# Altium PCB 388D_Control_v1_PCB1.PcbDoc (part 7 of 7)
Units mil, origin at the board's own origin, x right, y up, seen from the top; angles counter-clockwise.
Board outline 3431 x 3800 mil, 6 copper layers (Top Layer, Singal Layer 2, Signal layer 3, Signal Layer 4, Signal Layer 5, Bottom Layer), stack 32.7 mil thick; 270 components, 383 nets, 1462 pads, 899 vias.
Unrouted connection lines stored in the file: 19.
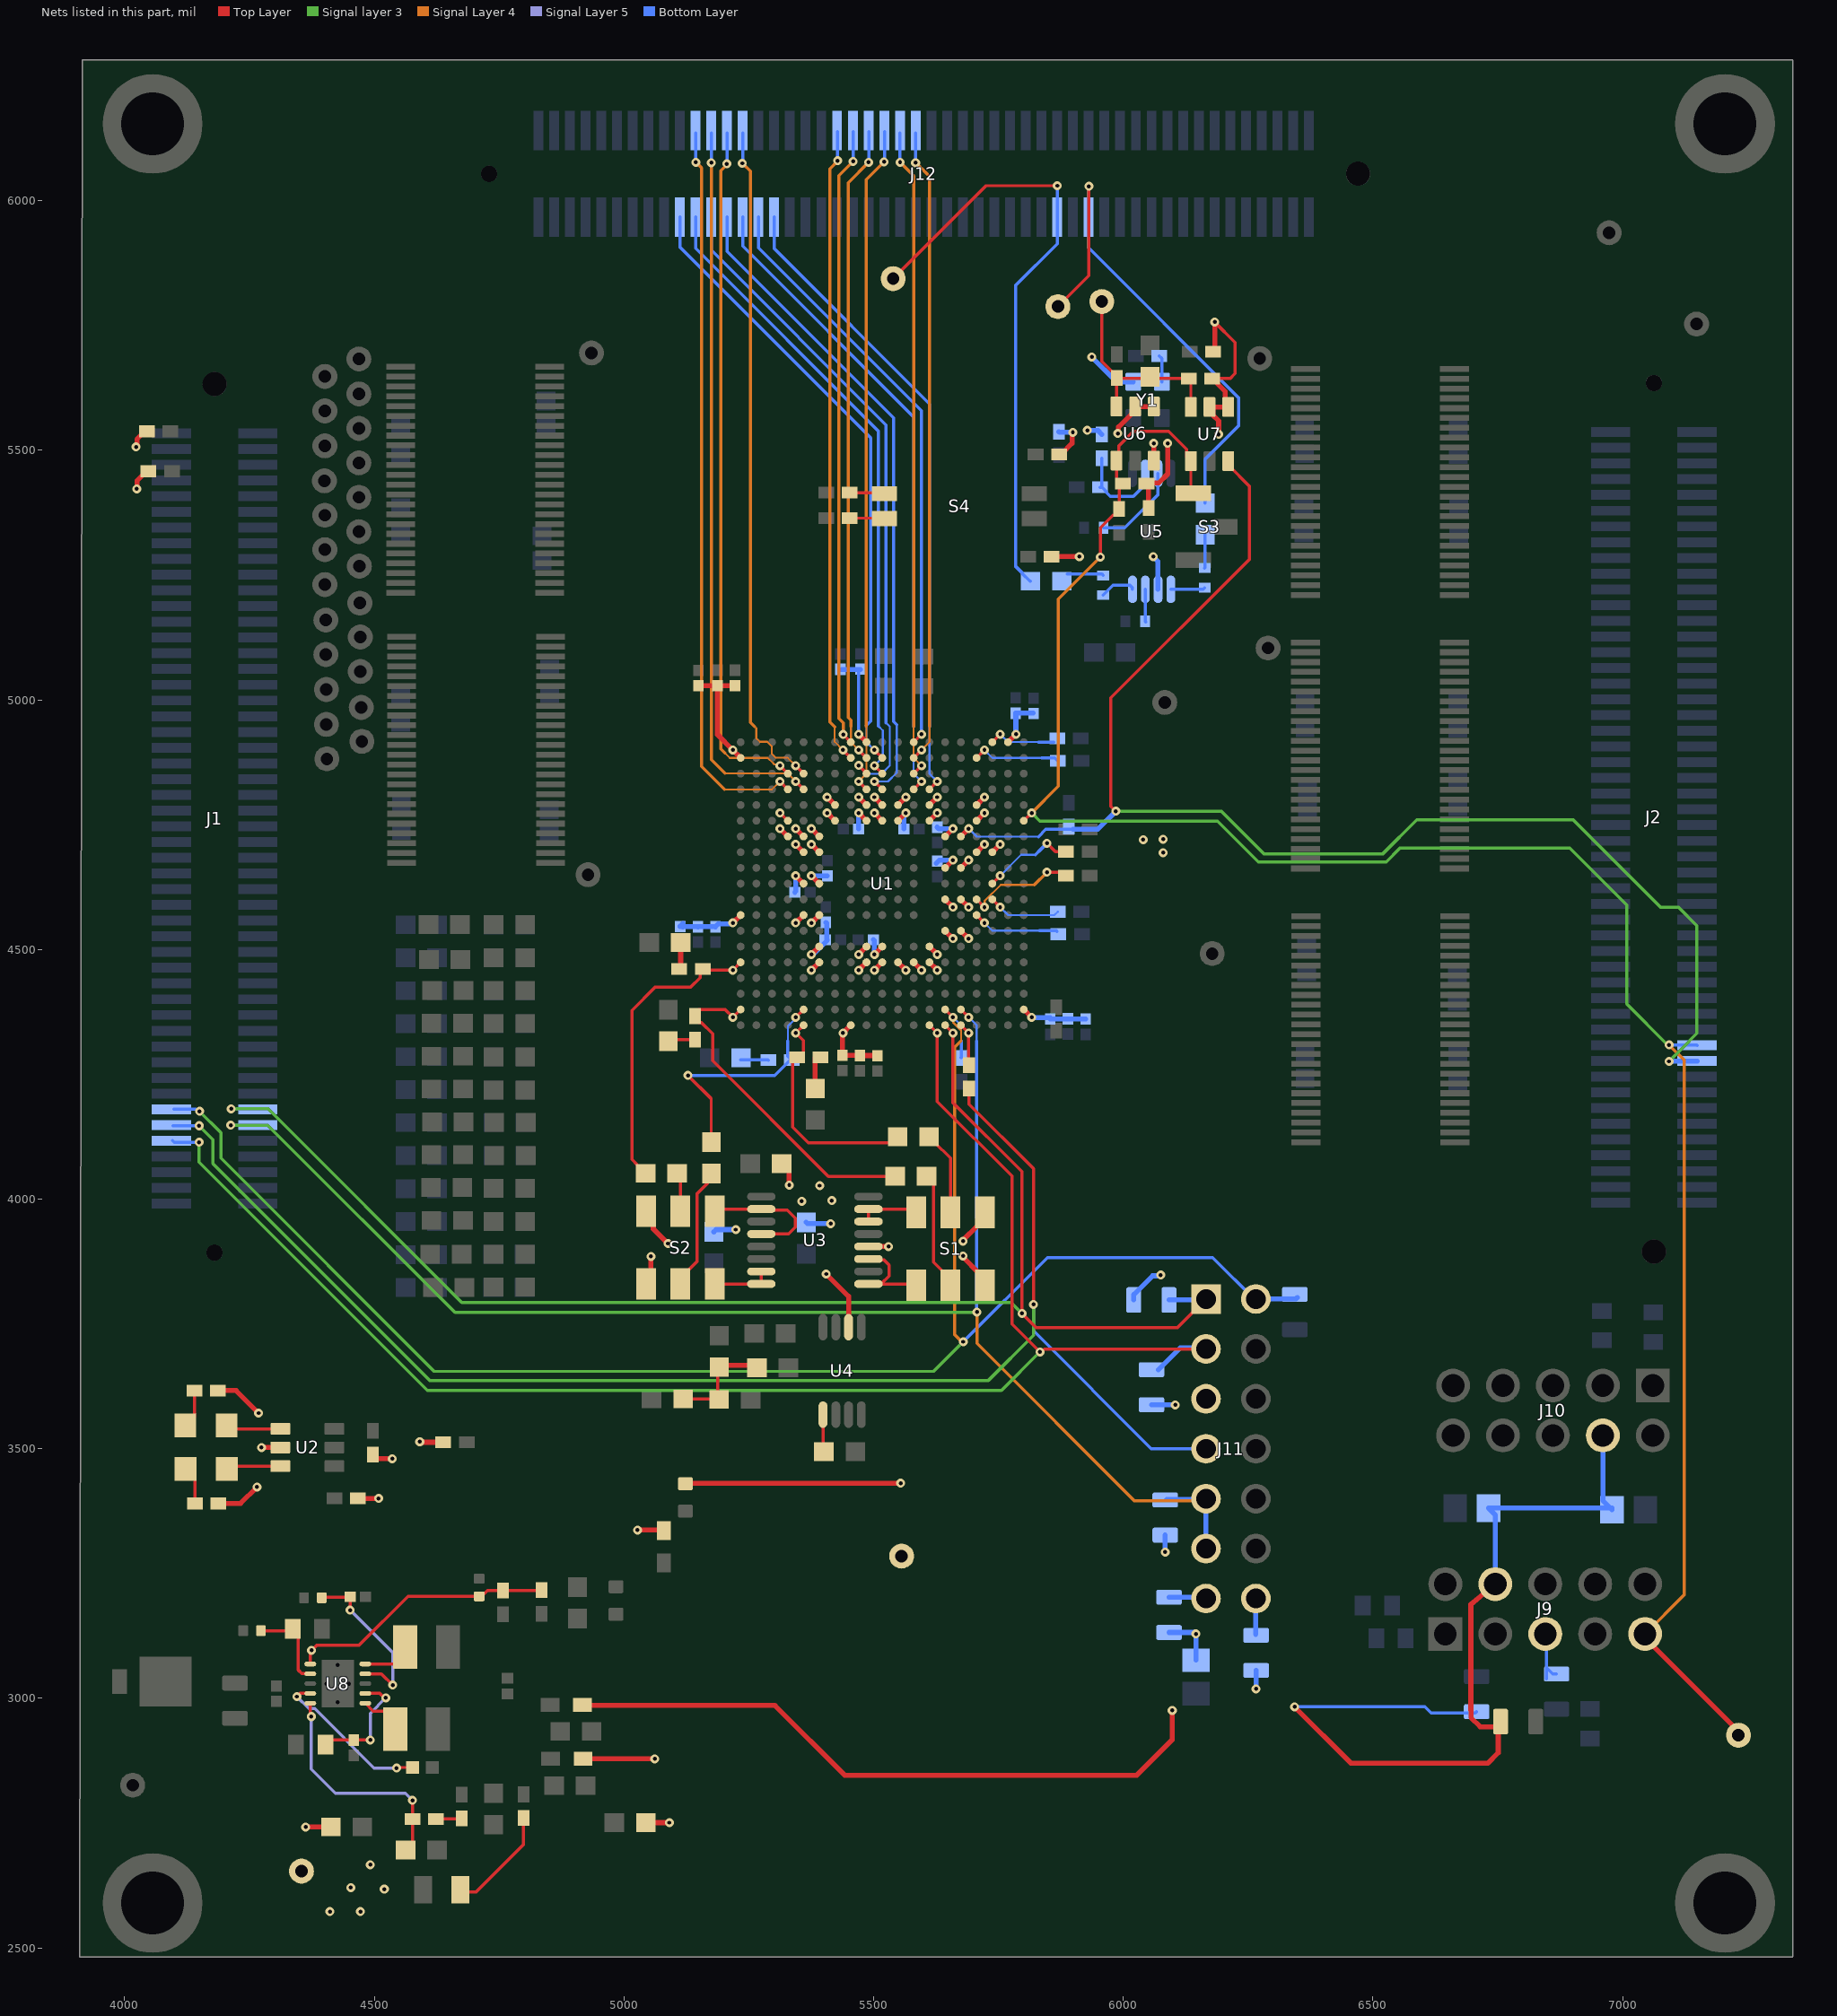
[diagram p9: the nets of this part, all layers, seen from the top]

## Via types
v1: diameter 18, hole 8, Top Layer to Bottom Layer, tented both sides, 898 vias
v2: diameter 18/18/18/18/18/18 (per signal layer), hole 8, Top Layer to Bottom Layer, tented both sides, 1 vias

## Nets (pads, with @x,y where several pads share a name; then routed paths per layer and width w, separated by ;. In a path a pad name is that pad's centre, name@x,y a point inside that pad or via, vN(x,y) a via of type N, cw(c..) or ccw(c..) an arc to the next point about the centre after c; other vN are vias at no path point) (continued)
MCU_GPIO152: J12.69 U1.D13 | length 1288.2
  Top Layer w6.25: U1.D13@5611.66,4820.97 v1(5627.41,4836.71)
  Bottom Layer w4: 5612.01,4947.1 5612.01,4852.12 v1(5627.41,4836.71)
  Bottom Layer w6.25: J12.69@5300.79,5967.39 5300.79,5904.21 5612.01,5592.99 5612.01,4947.1
MCU_GPIO153: J12.71 U1.A12 | length 1193.7
  Top Layer w6.25: U1.A12@5580.17,4915.45 v1(5595.92,4931.2)
  Bottom Layer w6.25: J12.71@5269.29,5967.39 5269.29,5905.71 5595.92,5579.08 v1(5595.92,4931.2)
MCU_GPIO154: J12.52 U1.B12 | length 1271.2
  Top Layer w6.25: U1.B12@5580.17,4883.96 v1(5595.92,4899.7)
  Signal Layer 4 w4: v1(5595.92,4899.7) 5612.01,4915.8 5612.01,4946.95
  Signal Layer 4 w6.25: v1@5588.49,6072.51 5612.01,6048.99 5612.01,4946.95
  Bottom Layer w6.25: J12.52@5583.84,6135.61 5583.84,6076.16 v1(5584,6076)
MCU_GPIO155: J12.54 U1.C12 | length 1307.7
  Top Layer w6.25: U1.C12@5580.17,4852.46 v1(5595.92,4868.21)
  Signal Layer 4 w4: 5580.17,4946.95 5580.17,4883.96 v1(5595.92,4868.21)
  Signal Layer 4 w6.25: v1(5553,6077) 5580.17,6049.83 5580.17,4946.95
  Bottom Layer w6.25: J12.54@5552.35,6135.61 5552.35,6077.65 v1(5553,6077)
MCU_GPIO156: J12.73 U1.D12 | length 1301.3
  Top Layer w6.25: U1.D12@5580.17,4820.97 v1(5595.92,4836.71)
  Bottom Layer w4: 5580.01,4946.95 5580.01,4852.62 v1(5595.92,4836.71)
  Bottom Layer w6.25: J12.73@5237.8,5967.39 5237.8,5909.2 5580.01,5566.99 5580.01,4946.95
MCU_GPIO157: J12.81 U1.B10 | length 1258.5
  Top Layer w6.25: v1(5501.43,4899.7) U1.B10@5517.18,4883.96
  Bottom Layer w4: 5485.4,4948.74 5485.4,4915.73 v1(5501.43,4899.7)
  Bottom Layer w6.25: J12.81@5111.81,5967.39 5111.81,5907.19 5494.01,5524.99 5494.01,4957.34 5485.4,4948.74
MCU_GPIO158: J12.79 U1.C10 | length 1283.9
  Top Layer w6.25: v1(5501.43,4868.21) U1.C10@5517.18,4852.46
  Bottom Layer w4: v1(5501.43,4868.21) 5518.4,4885.19 5518.4,4938.7 5509.01,4948.1
  Bottom Layer w6.25: J12.79@5143.31,5967.39 5143.31,5904.69 5509.01,5538.99 5509.01,4948.1
MCU_GPIO159: J12.75 U1.D10 | length 1328.4
  Top Layer w6.25: v1(5501.43,4836.71) U1.D10@5517.18,4820.97
  Bottom Layer w4: v1(5501.43,4836.71) 5528.67,4836.71 5546.4,4854.45 5546.4,4950.14
  Bottom Layer w6.25: J12.75@5206.3,5967.39 5206.3,5898.7 5540.01,5564.99 5540.01,4956.54 5546.4,4950.14
MCU_GPIO160: J12.58 U1.B9 | length 1287
  Top Layer w6.25: v1(5469.93,4899.7) U1.B9@5485.68,4883.96
  Signal Layer 4 w4: 5454.4,4946.95 5454.4,4915.23 v1(5469.93,4899.7)
  Signal Layer 4 w6.25: 5454.4,4946.95 5454.4,4959.29 5449,4964.7 5449,6036 v1(5490,6077)
  Bottom Layer w6.25: v1(5490,6077) 5490.34,6077.34 J12.58@5490.34,6138.61
MCU_GPIO161: J12.77 U1.C9 | length 1346.4
  Top Layer w6.25: v1(5470,4869) 5485.68,4853.32 U1.C9@5485.68,4852.46
  Bottom Layer w4: v1(5470,4869) 5487,4852 5516,4852 5532.4,4868.4 5532.4,4946.55 5525,4953.96
  Bottom Layer w6.25: J12.77@5174.8,5967.39 5174.8,5901.2 5525,5551 5525,4953.96
MCU_GPIO162: J12.56 U1.D9 | length 1345.7
  Top Layer w6.25: v1(5469.93,4836.71) U1.D9@5485.68,4820.97
  Signal Layer 4 w4: v1(5469.93,4836.71) 5485.4,4852.19 5485.4,4946.95
  Signal Layer 4 w6.25: 5485.4,4946.95 5485.4,6042.4 v1(5521,6078)
  Bottom Layer w6.25: v1(5521,6078) 5521.83,6078.83 J12.56@5521.83,6138.61
MCU_GPIO163: J12.60 U1.A8 | length 1245.3
  Top Layer w6.25: v1(5439,4931) 5439,4930.64 U1.A8@5454.19,4915.45
  Signal Layer 4 w6.25: v1(5439,4931) 5439,4954 5430,4963 5430,6050 v1(5459,6079)
  Bottom Layer w6.25: J12.60@5458.84,6138.61 5458.84,6079.16 v1(5459,6079)
MCU_GPIO164: J12.62 U1.B8 | length 1279
  Top Layer w6.25: v1(5438.44,4899.7) U1.B8@5454.19,4883.96
  Signal Layer 4 w4: 5422.01,4946.1 5422.01,4916.13 v1(5438.44,4899.7)
  Signal Layer 4 w6.25: 5422.01,4946.1 5412.01,4956.1 5412.01,6064.01 v1(5428,6080)
  Bottom Layer w6.25: J12.62@5427.35,6138.61 5427.35,6080.65 v1(5428,6080)
MCU_GPIO165: J12.74 U1.C5 | length 1357.2
  Top Layer w6.25: v1(5343.95,4868.21) U1.C5@5359.7,4852.46
  Signal Layer 4 w4: 5261.16,4946.95 5265.01,4943.1 5265.01,4923.1 5272.01,4916.1 5287.01,4916.1 5296.01,4907.1 5296.01,4892.1 5304.01,4884.1 5328.06,4884.1 v1(5343.95,4868.21)
  Signal Layer 4 w6.25: v1(5237,6075) 5253.01,6058.99 5253.01,4955.1 5261.16,4946.95
  Bottom Layer w6.25: v1(5237,6075) 5237.83,6075.83 J12.74@5237.83,6135.61
MCU_GPIO166: J12.78 U1.D5 | length 1455.6
  Top Layer w6.25: v1(5343.95,4836.71) U1.D5@5359.7,4820.97
  Signal Layer 4 w4: 5202.22,4853.1 5327.56,4853.1 v1(5343.95,4836.71)
  Signal Layer 4 w6.25: 5175,6066.98 5175,4880.32 5202.22,4853.1
  Bottom Layer w6.25: J12.78@5174.84,6135.61 5174.84,6076.16 v1(5175,6076)
MCU_GPIO167: J12.76 U1.C4 | length 1388.6
  Top Layer w6.25: v1(5312.45,4868.21) U1.C4@5328.2,4852.46
  Signal Layer 4 w4: 5202,4894 5212.04,4883.96 5288.04,4883.96 5299.01,4872.99 5301.11,4870.89 5309.77,4870.89 v1(5312.45,4868.21)
  Signal Layer 4 w6.25: 5202,4894 5194,4902 5194,6060 v1@5204,6070
  Bottom Layer w6.25: v1(5206,6074) 5206.34,6074.34 J12.76@5206.34,6135.61
MCU_GPIO168: J12.80 U1.D4 | length 1479.1
  Top Layer w6.25: v1(5312.45,4836.71) U1.D4@5328.2,4820.97
  Signal Layer 4 w4: 5201.03,4820.74 5296.48,4820.74 v1(5312.45,4836.71)
  Signal Layer 4 w6.25: v1(5144,6077) 5155.01,6065.99 5155.01,4866.76 5201.03,4820.74
  Bottom Layer w6.25: J12.80@5143.35,6135.61 5143.35,6077.65 v1(5144,6077)
MCU_TCK: J1.89 J11.9 J11.11 R173.1 U1.V15 | length 3164.7
  Top Layer w6.25: U1.V15@5674.66,4380.02 v1(5690.4,4364.27)
  Signal layer 3 w6.25: v1(4212.43,4148.1) 4286.45,4148.1 4661.55,3773 5706,3773 v1(5707,3774)
  Signal Layer 4 w6.25: v1(5707,3774) 5707,3711 6022,3396 6161.5,3396 J11.9@6165.5,3400
  Bottom Layer w4: v1(5690.4,4364.27) 5706.01,4348.67 5706.01,4317.03
  Bottom Layer w6.25: v1(4212.43,4148.1) J1.89@4271.11,4148.1 ; 5706.01,4317.03 5706.01,3774.99 v1(5707,3774) ; R173.1@6084,3397.43 6086.57,3400 J11.9@6165.5,3400
  Bottom Layer w10: J11.11@6165.5,3300 J11.9@6165.5,3400
MCU_TDI: J1.92 J11.3 R172.1 U1.W13 | length 3204.5
  Top Layer w6.25: U1.W13@5611.66,4348.52 v1(5627.41,4332.78) 5627.41,4195.7 5777,4046.11 5777,3750 v1(5833,3694) 5836.18,3694 5841.68,3699.5 6165,3699.5 J11.3@6165.5,3700
  Signal layer 3 w6.25: v1(4149,4114) 4149,4074.11 4606.11,3617 5756,3617 v1(5833,3694)
  Bottom Layer w6.25: J1.92@4096.11,4117.1 4099.21,4114 v1(4149,4114)
  Bottom Layer w10: R172.1@6070.5,3658.43 6114.07,3702 J11.3@6176.5,3702
MCU_TDO: J1.90 J11.7 R59.1 | length 3043.7
  Top Layer w6.25: R59.1@5691.01,4221.48 5691.01,4190.1 5820,4061.11 v1(5820,3789)
  Signal layer 3 w6.25: v1(4149,4147) 4177,4119 4177,4071.11 4611.11,3637 5730,3637 5820,3727 v1(5820,3789)
  Bottom Layer w6.25: J1.90@4097.11,4147.1 4097.21,4147 v1(4149,4147) ; v1(5820,3789) 5820,3736 6056,3500 J11.7@6165.5,3500
MCU_TMS: J1.87 J11.1 R171.1 U1.W14 | length 2948.7
  Top Layer w6.25: U1.W14@5643.16,4348.52 v1(5658.91,4332.78) 5658.91,4193.2 5797,4055.11 v1(5797,3771) 5825,3743 6108.5,3743 J11.1@6165.5,3800
  Signal layer 3 w6.25: v1(4213.43,4181.1) 4287.01,4181.1 4675.11,3793 5775,3793 v1(5797,3771)
  Bottom Layer w6.25: v1(4213.43,4181.1) J1.87@4272.11,4181.1
  Bottom Layer w10: R171.1@6091.43,3798 6158,3798 J11.1@6172.69,3812.69 ; J11.1@6176.5,3802 J11.1@6179.5,3805
MCU_TRSTn: J1.88 J11.2 R62.2 R175.2 U1.V14 | length 3408.2
  Top Layer w6.25: U1.V14@5643.16,4380.02 v1(5658.91,4364.27)
  Signal layer 3 w6.25: v1(4150,4176) 4193,4133 4193,4082.11 4620.11,3655 5620.25,3655 v1(5679.53,3714.29)
  Signal Layer 4 w4: v1(5658.91,4364.27) 5658.91,4354.2 5675.01,4338.1 5675.01,4317.03
  Signal Layer 4 w6.25: 5675.01,4317.03 5662.01,4304.03 5662.01,3728.63 5676.35,3714.29 v1(5679.53,3714.29)
  Bottom Layer w4: v1(5658.91,4364.27) 5675.4,4347.78 5675.4,4317.03
  Bottom Layer w6.25: J1.88@4098.11,4180.1 4142.72,4180.1 4146.82,4176 v1(4150,4176) ; R62.2@5674.78,4283.34 5675.4,4283.96 5675.4,4317.03 ; v1(5679.53,3714.29) 5848.25,3883 6179,3883 J11.2@6263.75,3798.25
  Bottom Layer w10: J11.2@6265.5,3800 6345.46,3800 R175.2@6348.5,3803.04
MCU_XRSn: C74.1 J2.22 J9.9 R68.1 S3.1 TP6.1 U1.F19 U6.1 U7.1 | length 4285.9
  Top Layer w6.25: U1.F19@5800.64,4757.97 v1(5816.39,4773.72) ; v1(5954,5286.23) 5954,5344.62 5979.09,5369.71 5983.03,5369.71 5991.72,5378.39 C74.1@5991.72,5382.33 5991.72,5426.33 R68.1@5999.09,5433.71 ; 5986.31,5446.49 U6.1@5986.31,5479.58 5990.84,5484.1 5990.84,5508.93 6020.01,5538.1 6090.9,5538.1 6126.63,5502.37 6126.63,5487.26 U7.1@6135.31,5478.58 6135.31,5418.88 S3.1@6140.42,5413.77 6120.94,5413.77 S3.1@6110.01,5402.84
  Top Layer w10: J9.9@7045,3129 7045,3121 7232,2934 TP6.1@7232,2926
  Signal layer 3 w6.25: v1(5816.39,4773.72) 5833.11,4757 6189,4757 6270.29,4675.71 6526.71,4675.71 6554,4703 6894,4703 7008,4589 7008,4391 7090,4309 v1(7093,4309)
  Signal Layer 4 w6.25: v1(5816.39,4773.72) 5870,4827.33 5870,5202.23 v1(5954,5286.23) ; J9.9@7045,3129 7123,3207 7123,4279 v1(7093,4309)
  Bottom Layer w6.25: v1(7093,4309) 7148.45,4309 J2.22@7149.24,4308.21
NetC26_1: C26.1 R37.2 | length 55.2
  Top Layer w6.25: C26.1@5084.01,4304.61 C26.1@5084.01,4305.59 ; C26.1@5089.01,4316.61 5091.88,4319.48 R37.2@5142.01,4319.48
NetC27_1: C27.1 R38.2 | length 63.2
  Top Layer w10: C27.1@5383.01,4221.6 5383.01,4281.55 R38.2@5385.29,4283.83
NetC28_1: C28.1 R39.2 | length 56.1
  Top Layer w10: R39.2@5106.45,4461.1 5106.69,4461.1 5113.5,4467.91 C28.1@5113.5,4514.1
NetC29_1: C29.1 R40.2 | length 55.8
  Bottom Layer w6.25: C29.1@5233.16,4278.76 5288.55,4278.76 R40.2@5288.83,4278.48
NetC32_1: C32.1 R41.2 R42.1 R43.1 | length 213.1
  Top Layer w6.25: R41.2@5118.45,3599.9 R42.1@5189.46,3599.9 ; R43.1@5187.95,3667.4 5187.95,3623.5 5187.95,3601.4 R42.1@5189.46,3599.9 ; R42.1@5190.46,3598.9 R42.1@5189.46,3599.9
  Top Layer w10: R43.1@5187.95,3667.4 5256.95,3667.4 C32.1@5259.46,3664.9
NetC34_1: C34.1 U4.5 | length 72.5
  Top Layer w6.25: C34.1@5398.61,3495.89 U4.5@5398.61,3568.4
NetC36_2: C36.2 R50.1 R53.2 U8.1 | length 542.5
  Top Layer w6.25: U8.1@4371.74,3068.87 4371.74,3093.77 v1(4374.4,3096.43) 4383.97,3106 4469,3106 4567.28,3204.28 R53.2@4710,3204.28 ; R53.2@4709,3198.28 4726.72,3216 4834.38,3216 C36.2@4835,3216.62
NetC40_2: C40.2 R45.1 U8.9 | length 331.5
  Top Layer w6.25: R45.1@4397.08,3202.5 4450.51,3202.5 C40.2@4451.51,3203.5 v1(4451.51,3176.85) ; U8.9@4481.98,3049.18 4514.18,3049.18 v1(4536.86,3026.5)
  Signal Layer 5 w6.25: v1(4451.51,3176.85) 4536.86,3091.5 v1(4536.86,3026.5)
NetC41_2: C41.2 R46.1 U8.7 | length 236
  Top Layer w6.25: R46.1@4401.86,2908.03 R46.1@4402.39,2907.5 4411.39,2916.5 C41.2@4458.86,2916.5 v1(4491.86,2916.5) ; U8.7@4481.98,3009.81 4511.01,3009.81 4519.82,3001 v1(4523,3001)
  Signal Layer 5 w6.25: v1(4491.86,2916.5) 4491.86,2969.86 v1(4523,3001)
NetC76_1: C76.1 R71.1 R72.1 TP7.1 U6.6 U7.6 | length 423.6
  Top Layer w6.25: TP7.1@5957,5798 5957,5678.6 5981.34,5654.26 5981.34,5643.71 6053.72,5643.71 R71.1@6131.09,5643.71 6135.31,5639.49 U7.6@6135.31,5586.84 ; U6.6@5986.31,5587.84 C76.1@5986.31,5638.73
NetD3_1: D3.1 U2.6 | length 109.5
  Top Layer w6.25: D3.1@4204.61,3459.55 4210.21,3465.15 U2.6@4311.8,3465.15
NetD3_2: D3.2 R66.2 | length 76.8
  Top Layer w6.25: D3.2@4121.93,3459.55 4121.93,3457.58 4140.49,3439.02 R66.2@4140.49,3390.45
NetD4_1: D4.1 U2.4 | length 110.3
  Top Layer w6.25: D4.1@4204.27,3546.55 4210.87,3539.95 U2.4@4311.8,3539.95
NetD4_2: D4.2 R67.2 | length 77.3
  Top Layer w6.25: D4.2@4121.6,3546.55 4139.49,3564.45 R67.2@4139.49,3616.45
NetJ9_5: J9.5 R162.1 | length 117.3
  Bottom Layer w6.25: J9.5@6846.69,3131.35 6847.32,3130.71 R162.1@6847.32,3038.57 ; R162.1@6848.32,3060.57 6860.11,3048.78 R162.1@6867.69,3048.78
NetJ11_13: J11.13 R174.1 | length 85.2
  Bottom Layer w10: R174.1@6091.5,3202.43 6091.72,3202.22 6176.28,3202.22 J11.13@6176.5,3202
NetJ11_14: J11.14 R170.1 | length 71.6
  Bottom Layer w10: R170.1@6265.5,3128.41 J11.14@6265.5,3200
NetL1_1: L1.1 U8.6 | length 106.7
  Top Layer w6.25: U8.6@4481.98,2990.13 4497.61,2974.5 L1.1@4550.63,2974.5 ; L1.1@4552.63,2964.5 4561.15,2955.99 L1.1@4561.15,2936.5
NetL2_1: L2.1 U8.10 | length 91.4
  Top Layer w6.25: U8.10@4481.98,3068.87 4538.06,3068.87 4559.15,3089.96 L2.1@4559.15,3095.5
NetLED1_2: LED1.2 R47.1 | length 222.9
  Top Layer w6.25: LED1.2@4668.4,2612.35 4703.83,2612.35 4799,2707.51 R47.1@4799,2760.35
NetR3_2: R3.2 U1.M16 | length 174.8
  Top Layer w6.25: U1.M16@5706.15,4569 v1(5721.9,4553.25)
  Bottom Layer w4: v1(5721.9,4553.25) 5737.41,4537.74 5832.4,4537.74
  Bottom Layer w6.25: 5832.4,4537.74 5866.03,4537.74 R3.2@5867.4,4536.36
NetR4_2: R4.2 U1.L16 | length 224.9
  Top Layer w6.25: U1.L16@5706.15,4600.49 v1(5721.9,4584.74) ; v1(5847,4655) 5878.38,4655 R4.2@5885.38,4648
  Signal Layer 4 w4: v1@5722.52,4585.36 5722.52,4597.61 5754.57,4629.66 5821.66,4629.66
  Signal Layer 4 w6.25: v1(5721.9,4584.74) v1@5722.52,4585.36 ; 5821.66,4629.66 v1(5847,4655)
NetR5_2: R5.2 U1.L17 | length 147.2
  Top Layer w6.25: U1.L17@5737.65,4600.49 v1(5753.4,4584.74)
  Bottom Layer w4: v1(5753.4,4584.74) 5769.4,4568.74 5861.78,4568.74 R5.2@5868.78,4575.74
NetR6_2: R6.2 U1.K17 | length 188.3
  Top Layer w6.25: U1.K17@5737.65,4631.99 v1(5753.4,4647.74) ; v1(5847,4713) 5863.9,4696.1 R6.2@5885.39,4696.1
  Bottom Layer w4: v1(5753.4,4647.74) 5795.4,4689.74 5823.74,4689.74
  Bottom Layer w6.25: 5823.74,4689.74 5835.1,4701.1 v1(5847,4713)
NetR7_2: R7.2 U1.A17 | length 136.1
  Top Layer w6.25: U1.A17@5737.65,4915.45 v1(5753.4,4931.2)
  Bottom Layer w4: v1(5753.4,4931.2) 5768.86,4915.74 5830.4,4915.74
  Bottom Layer w6.25: 5830.4,4915.74 R7.2@5860.78,4915.74
NetR8_2: R8.2 U1.B16 | length 178.3
  Top Layer w6.25: U1.B16@5706.15,4883.96 v1(5721.9,4899.7)
  Bottom Layer w4: v1(5721.9,4899.7) 5737.87,4883.74 5836.4,4883.74
  Bottom Layer w6.25: 5836.4,4883.74 5862.78,4883.74 R8.2@5868.78,4877.74
NetR9_1: R9.1 S1.5 | length 237.7
  Top Layer w6.25: R9.1@5606,4045.76 5620,4031.76 5620,3873.74 5654,3839.74 S1.5@5654,3827.93
NetR9_2: R9.2 R37.1 U1.V1 | length 675.8
  Top Layer w6.25: R37.1@5142.01,4366.72 5142.01,4362.79 5150.69,4354.1 5154.63,4354.1 5177.46,4331.27 5177.46,4277.54 5409.24,4045.76 R9.2@5543.01,4045.76 ; R37.1@5142.01,4370.66 5150.69,4379.35 5202.89,4379.35 v1(5217.97,4364.27) U1.V1@5233.71,4380.02
NetR16_1: R16.1 S1.2 | length 169.3
  Top Layer w6.25: R16.1@5611.01,4125.1 5613.96,4122.15 5622.01,4114.1 5654,4082.11 S1.2@5654,3973.6
NetR16_2: R16.2 R38.1 U1.W5 | length 469
  Top Layer w6.25: R38.1@5346.39,4284.1 5338,4275.72 5338,4144.11 5369.01,4113.1 5539.29,4113.1 5540.22,4114.03 5542.96,4114.03 5558.53,4129.6 R16.2@5559.52,4129.6 ; R38.1@5346.88,4283.83 5350.05,4283.83 5359.01,4292.79 5359.01,4317.72 v1(5343.95,4332.78) U1.W5@5359.7,4348.52
NetR25_1: R25.1 S2.5 | length 69.4
  Top Layer w6.25: S2.5@5113,3975.59 5113,4044.26 R25.1@5113.5,4044.76
NetR25_2: R25.2 R39.1 U1.R1 | length 605.1
  Top Layer w6.25: R25.2@5043.5,4051.76 5042.52,4051.76 5026.94,4067.34 5026.94,4068.32 5016.01,4079.25 5016.01,4378.1 5063.01,4425.1 5134.01,4425.1 5152.48,4443.58 5152.48,4455.96 R39.1@5157.63,4461.1 5159.97,4458.76 v1(5217.97,4458.76) U1.R1@5233.71,4474.51
NetR30_1: R30.1 S2.2 | length 248.8
  Top Layer w6.25: S2.2@5113,3829.93 5113,3841.74 5146,3874.74 5146,4010.76 5167.44,4032.2 5167.44,4033.18 5183.01,4048.76 R30.1@5184,4048.76
NetR30_2: R30.2 R40.1 U1.V5 | length 496.3
  Top Layer w6.25: v1(5128,4248) 5174.65,4201.35 R30.2@5174.65,4109.69 ; v1(5343.95,4364.27) U1.V5@5359.7,4380.02
  Bottom Layer w4: 5328.02,4317.03 5328.2,4317.21 5328.2,4346.3 5343.95,4362.04 v1(5343.95,4364.27)
  Bottom Layer w6.25: v1(5128,4248) 5301.66,4248 5332.14,4278.48 R40.1@5336.07,4278.48 5328.02,4286.53 5328.02,4317.03
NetR44_1: R44.1 U8.4 | length 321.1
  Top Layer w6.25: v1(4344.86,3003.5) 4351.18,3009.81 U8.4@4371.74,3009.81 ; v1(4544.5,2860.5) 4545.5,2861.5 R44.1@4576.81,2861.5
  Signal Layer 5 w6.25: v1(4344.86,3003.5) 4368.74,2979.62 4380.54,2979.62 4499.67,2860.5 v1(4544.5,2860.5)
NetR48_1: R48.1 R49.2 | length 51.9
  Top Layer w6.25: R49.2@4623.62,2758.35 4673.62,2758.35 R48.1@4675,2759.72
NetR49_1: R49.1 R54.2 U8.5 | length 466.6
  Top Layer w6.25: U8.5@4371.74,2990.13 4371.74,2965.62 v1(4373.86,2963.5) ; R54.2@4562.5,2696.35 4576.38,2710.22 R49.1@4576.38,2758.35 4576.5,2758.47 v1(4576.5,2795.85)
  Signal Layer 5 w6.25: v1(4373.86,2963.5) 4373.86,2858.14 4422,2810 4562.35,2810 v1(4576.5,2795.85)
NetR51_1: R51.1 R52.2 U8.2 | length 196
  Top Layer w6.25: R51.1@4272.86,3135.5 4332.33,3135.5 R52.2@4336.33,3139.5 4342.86,3132.98 R52.2@4342.86,3129.65 ; R52.2@4337.7,3144.5 4339.6,3141.92 4344.66,3135.09 4347.84,3131.92 4347.84,3056.5 4354.54,3049.8 U8.2@4371.74,3049.8
NetR59_2: R59.2 U1.W15 | length 79.9
  Top Layer w6.25: U1.W15@5674.66,4348.52 v1(5690.4,4332.78) R59.2@5690.4,4275.1
NetR77_1: R77.1 U5.3 | length 179.1
  Bottom Layer w6.25: R77.1@5960.53,5344.8 6002.85,5344.8 6069.64,5411.59 U5.3@6069.64,5453.94
NetR78_1: R78.1 U5.8 | length 72.1
  Bottom Layer w6.25: R78.1@5959.53,5210.11 5979.21,5229.8 6013.16,5229.8 6018.46,5224.5 U5.8@6018.46,5221.65
NetR79_1: R79.1 S4.3 | length 70.2
  Top Layer w6.25: R79.1@5452.32,5415.21 5519.69,5415.21 S4.3@5521.69,5413.21
NetR80_2: R80.2 S4.4 | length 69.8
  Top Layer w6.25: R80.2@5452.32,5364.21 5520.69,5364.21 S4.4@5521.69,5363.21
NetR81_1: R81.1 U5.5 | length 68.9
  Bottom Layer w6.25: U5.5@6095.23,5221.65 6159.7,5221.65 R81.1@6162.85,5224.8
NetR82_1: R82.1 Y1.1 | length 53.6
  Bottom Layer w6.25: R82.1@6072.29,5688.95 6077.21,5684.03 Y1.1@6077.21,5637.37
NetR83_1: R83.1 U5.7 | length 66.3
  Bottom Layer w6.25: U5.7@6044.05,5221.65 6044.05,5156.91 R83.1@6045.16,5155.8
NetR84_2: R84.2 R86.1 U5.2 | length 175.2
  Bottom Layer w6.25: R86.1@5953.62,5426 R86.1@5956.85,5426 ; R84.2@5956.85,5484.18 R86.1@5956.85,5426 ; U5.2@6049.96,5437.58 6020.3,5407.92 5974.08,5407.92 5966.25,5415.75 5966.25,5417.31 5957.56,5426 R86.1@5956.85,5426
NetS1_3: S1.3 U3.6 U3.7 | length 123.2
  Top Layer w6.25: U3.6@5489.6,3955.15 U3.7@5489.6,3980.15 5578.55,3980.15 S1.3@5585.1,3973.6
NetS1_6: S1.6 U3.1 U3.3 | length 187.3
  Top Layer w6.25: U3.1@5489.6,3830.15 U3.1@5515,3830.15 ; U3.3@5489.6,3880.15 5491.41,3878.33 5520.67,3878.33 5531,3868 5531,3846.15 U3.1@5515,3830.15 ; S1.6@5585.1,3827.93 5582.88,3830.15 U3.1@5515,3830.15
NetS2_3: S2.3 U3.15 U3.16 | length 117.9
  Top Layer w6.25: S2.3@5182.12,3830.15 U3.16@5275.03,3830.15 U3.15@5275.03,3855.15
NetS2_6: S2.6 U3.10 U3.12 | length 285.1
  Top Layer w6.25: S2.6@5179.3,3969.92 5189.53,3980.15 U3.10@5275.03,3980.15 5276.85,3978.33 5326.67,3978.33 5343,3962 5343,3943.59 5329.56,3930.15 U3.12@5296.32,3930.15 ; U3.12@5275.03,3930.15 U3.12@5295.7,3930.15 ; U3.12@5278.03,3929.15 U3.12@5296.32,3929.15
P0_25MHZ_CLK: R73.2 R78.2 | length 72.9
  Bottom Layer w6.25: R73.2@5888,5252 5957.33,5252 R78.2@5959.85,5249.48
P0_PHY_CLK: J12.33 R73.1 TP8.1 | length 1245.6
  Top Layer w6.25: TP8.1@5539,5844 5725.11,6030.11 v1(5867.72,6030.11)
  Bottom Layer w6.25: R73.1@5814.01,5238 5813.02,5238 5797.45,5253.58 5797.45,5254.56 5784,5268.01 5784,5830 5867.72,5913.72 J12.33@5867.72,5967.39 v1(5867.72,6030.11)
P1_25MHZ_CLK: R76.2 R81.2 | length 67.5
  Bottom Layer w6.25: R81.2@6162.85,5264.17 6163.85,5265.17 R76.2@6163.85,5331.3
P1_PHY_CLK: J12.29 R76.1 TP9.1 | length 1053.4
  Top Layer w6.25: TP9.1@5869,5788 5931,5850 v1(5931,6029)
  Bottom Layer w6.25: v1(5931,6029) 5931,5967.68 J12.29@5930.71,5967.39 5930.71,5905.29 6230.59,5605.41 6230.59,5548.59 6163.85,5481.85 R76.1@6163.85,5394.29
VDD_1V2: C44.2 C45.2 C46.2 C47.2 C48.2 C49.2 C50.2 C72.2 J2.20 L5.2 R55.2 TP3.1 U1.E9 U1.E11 U1.F9 U1.F11 U1.G14 U1.G15 U1.J14 U1.J15 U1.K5 U1.K6 U1.P10 U1.P13 U1.R10 U1.R13 U7.3 | length 3854
  Top Layer w6.25: v1(5985,4777) 5975,4787 5975,5004 6253,5282 6253,5427.82 6210.12,5470.7 U7.3@6210.12,5478.58
  Top Layer w10: v1(5027,3337) 5078.98,3337 L5.2@5080,3335.98 ; C72.2@5123,3430.05 5123.47,3430.53 5553.53,3430.53 v1(5554,3431) ; v1(5343.95,4647.74) U1.K5@5359.7,4631.99 ; v1(5375.44,4647.74) U1.K6@5391.19,4631.99 ; v1(5469.93,4773.72) U1.F9@5485.68,4757.97 ; v1(5469.93,4805.22) U1.E9@5485.68,4789.47 ; v1(5501.43,4458.76) U1.R10@5517.18,4474.51 ; v1(5501.43,4490.26) U1.P10@5517.18,4506.01 ; U1.F11@5548.67,4757.97 v1(5564.42,4773.72) ; U1.E11@5548.67,4789.47 v1(5564.42,4805.22) ; U1.R13@5611.66,4474.51 v1(5627.41,4458.76) ; U1.P13@5611.66,4506.01 v1(5627.41,4490.26) ; U1.J14@5643.16,4663.48 v1(5658.91,4679.23) ; U1.G14@5643.16,4726.48 v1(5658.91,4742.23) ; U1.J15@5674.66,4663.48 v1(5690.4,4679.23) ; U1.G15@5674.66,4726.48 v1(5690.4,4742.23)
  Signal layer 3 w6.25: v1(5985,4777) 6196.5,4777 6281.5,4692 6520,4692 6588,4760 6901,4760 7076,4585 7111.62,4585 7148.84,4547.78 7148.84,4331.84 7119.55,4302.55 v1(7093,4276)
  Bottom Layer w4: v1(5690.4,4742.23) 5706.63,4726 5830,4726
  Bottom Layer w6.25: 5830,4726 5844.74,4740.74 5865.16,4740.74 R55.2@5899.56,4740.74
  Bottom Layer w10: C48.2@5342.05,4614.74 5343.95,4616.64 v1(5343.95,4647.74) ; v1(5375.44,4647.74) C50.2@5407.05,4647.74 ; C45.2@5469.93,4741.91 v1(5469.93,4773.72) ; C49.2@5499.76,4519.74 5501.43,4518.07 v1(5501.43,4490.26) ; C44.2@5560.7,4741.74 5560.7,4767.83 5564.42,4771.56 v1(5564.42,4773.72) ; C47.2@5625.4,4672.88 5631.76,4679.23 v1(5658.91,4679.23) ; C46.2@5627.4,4745.09 5630.27,4742.23 v1(5658.91,4742.23) ; R55.2@5899.56,4740.74 5948.74,4740.74 v1(5985,4777) ; v1(7093,4276) 7093.36,4276.36 7148.88,4276.36 J2.20@7149.24,4276.72
VDD_3V3: C43.1 C55.2 C56.2 C57.2 C58.2 C59.2 C60.2 C61.2 C62.2 C63.2 C64.2 C65.2 C66.2 C67.2 C68.2 C69.2 C70.2 C73.1 C75.1 C77.1 C78.1 C163.1 C164.1 C165.1 J9.4 J10.4 J11.5 L3.2 R66.1 R67.1 R68.2 R69.2 R70.2 R71.2 R74.1 R75.2 R84.1 R158.2 R159.2 R170.2 R171.2 R172.2 R173.2 R174.2 R176.2 R177.1 TP2.1 U1.A9 U1.A18 U1.B1 U1.E7 U1.E10 U1.E13 U1.E16 U1.F4 U1.F7 U1.F10 U1.F13 U1.F16 U1.G4 U1.G5 U1.G6 U1.H5 U1.H6 U1.H16 U1.H17 U1.L14 U1.L15 U1.M1 U1.M5 U1.M6 U1.N14 U1.N15 U1.P9 U1.R9 U1.R11 U1.R12 U1.V19 U1.W8 U2.5 U5.6 U6.3 U6.4 U6.5 U7.4 U7.5 Y1.4 | length 6522.6
  Top Layer w6.25: v1(5312.45,4773.72) U1.F4@5328.2,4757.97 ; R71.2@6178.34,5643.71 6213.71,5643.71 6224,5654 6224,5716 v1(6183,5757)
  Top Layer w10: v1(4023,5507) 4024.53,5508.53 4024.53,5522.09 4040.44,5538 R177.1@4044.38,5538 ; v1(4024,5423) 4024.53,5423.53 4024.53,5439.09 4043.44,5458 R176.2@4047.38,5458 ; R67.1@4186.74,3616.45 4223.12,3616.45 v1(4268.12,3571.45) ; R66.1@4187.74,3390.45 4232.12,3390.45 v1(4265.12,3423.45) ; v1(4274.12,3502.55) U2.5@4311.8,3502.55 ; v1(4362.5,2742.35) C43.1@4413,2742.35 ; R69.2@4467.12,3400.45 v1(4508.49,3400.45) ; R70.2@4497.12,3488.45 4497.12,3486.81 4503.93,3480 v1(4536,3480) ; v1(4591,3514) 4592,3513 C73.1@4638,3513 ; L3.2@4916.98,2987 4918.23,2985.75 5302.25,2985.75 5442,2846 6027,2846 6098,2917 v1(6098,2976) ; C66.2@5149.11,5028.32 5149.32,5028.53 C65.2@5187.01,5028.53 ; C65.2@5187.01,5028.75 C65.2@5187.01,5028.53 ; v1@5216.34,4553.79 5215.8,4553.25 v1(5217.97,4553.25) U1.M1@5233.71,4569 ; C70.2@5222.01,5028.75 5221.8,5028.53 C65.2@5187.01,5028.53 ; U1.B1@5233.71,4883.96 v1(5217.97,4899.7) 5187.01,4930.66 C65.2@5187.01,5028.53 ; v1(5312.45,4742.23) U1.G4@5328.2,4726.48 ; v1(5343.95,4553.25) U1.M5@5359.7,4569 ; v1(5343.95,4710.73) U1.H5@5359.7,4694.98 ; v1(5343.95,4742.23) U1.G5@5359.7,4726.48 ; v1(5375.44,4553.25) U1.M6@5391.19,4569 ; v1(5375.44,4710.73) U1.H6@5391.19,4694.98 ; v1(5375.44,4742.23) U1.G6@5391.19,4726.48 ; v1(5406.94,4773.72) U1.F7@5422.69,4757.97 ; v1(5406.94,4805.22) U1.E7@5422.69,4789.47 ; U1.W8@5454.19,4348.52 v1(5438.44,4332.78) 5437.64,4331.98 C58.2@5437.64,4288.04 C61.2@5472.28,4288.04 ; v1(5469.93,4458.76) U1.R9@5485.68,4474.51 ; v1(5469.93,4490.26) U1.P9@5485.68,4506.01 ; v1(5469.93,4931.2) U1.A9@5485.68,4915.45 ; C61.2@5472.64,4287.68 C62.2@5507.28,4287.68 ; v1(5501.43,4773.72) U1.F10@5517.18,4757.97 ; v1(5501.43,4805.22) U1.E10@5517.18,4789.47 ; U1.R11@5548.67,4474.51 v1(5564.42,4458.76) ; U1.R12@5580.17,4474.51 v1(5595.92,4458.76) ; U1.F13@5611.66,4757.97 v1(5627.41,4773.72) ; U1.E13@5611.66,4789.47 v1(5627.41,4805.22) ; U1.N14@5643.16,4537.5 v1(5658.91,4521.75) ; U1.L14@5643.16,4600.49 v1(5658.91,4584.74) ; U1.N15@5674.66,4537.5 v1(5690.4,4521.75) ; U1.L15@5674.66,4600.49 v1(5690.4,4584.74) ; U1.H16@5706.15,4694.98 v1(5721.9,4710.73) ; U1.F16@5706.15,4757.97 v1(5721.9,4773.72) ; U1.E16@5706.15,4789.47 v1(5721.9,4805.22) ; U1.H17@5737.65,4694.98 v1(5753.4,4710.73) ; U1.A18@5769.15,4915.45 v1(5784.89,4931.2) ; U1.V19@5800.64,4380.02 v1(5816.39,4364.27) ; R75.2@5856.62,5287 v1(5912,5287) ; R74.1@5871.63,5492.1 5875.57,5492.1 5897.47,5514 5897.47,5534.47 v1(5899,5536) ; v1(5989,5534) 5990.53,5535.53 5990.53,5546.78 6023.72,5579.97 U6.5@6023.72,5587.84 U6.4@6061.12,5587.84 ; R68.2@6046.34,5433.71 6050.72,5429.33 C75.1@6050.72,5384.33 ; R68.2@6050.28,5433.71 6051.48,5434.91 6071.23,5434.91 6089,5452.68 v1(6089,5514) ; v1(6061,5514) 6061.12,5513.88 U6.3@6061.12,5479.58 U6.3@6061.12,5471.7 ; U7.5@6172.72,5586.84 U7.5@6172.88,5586.68 ; C77.1@6180.04,5697.9 6183,5700.86 v1(6183,5757) ; R71.2@6182.28,5643.71 6189.09,5636.9 6189.09,5632.96 6203.71,5618.34 6203.71,5593.25 U7.4@6210.12,5586.84 ; v1(6191,5532) 6191,5559 6179.53,5570.47 6179.53,5580.03 U7.5@6172.88,5586.68 ; U7.4@6209.95,5586.68 U7.5@6172.88,5586.68 ; v1(6343,2983) 6456,2870 6730,2870 6750.86,2890.86 6750.86,2937.14 6745.15,2942.85 R158.2@6755.65,2953.35 ; R158.2@6745,2943 6714.84,2943 6696.33,2961.5 6696.33,2976.6 6696,2976.93 6696,3188 J9.4@6745,3229
  Bottom Layer w6.25: v1(5469.93,4931.2) 5469.93,5058.08 5473.1,5061.24 C64.2@5473.59,5061.74 ; v1(6343,2983) 6604,2983 6616.38,2970.62 6705,2970.62 R159.2@6707.69,2973.31
  Bottom Layer w10: C68.2@5112.38,4546.81 5118.01,4552.44 C68.2@5118.8,4552.44 ; C68.2@5112.59,4545.81 C68.2@5117.38,4545.81 ; C68.2@5117.59,4544.81 5117.38,4545.02 C68.2@5117.38,4545.81 ; C69.2@5148.28,4545.6 C69.2@5148.28,4545.81 ; C67.2@5183.06,4545.81 C69.2@5148.28,4545.81 ; C67.2@5183.28,4545.6 5183.28,4546.09 5188.91,4551.72 5216.43,4551.72 v1(5217.97,4553.25) ; C63.2@5433.59,5061.24 C64.2@5473.1,5061.24 ; C56.2@5784.4,4973.38 C57.2@5819.73,4973.38 ; v1(5784.89,4931.2) C56.2@5784.89,4972.9 ; v1(5816.39,4364.27) 5816.71,4363.95 C60.2@5853.43,4363.95 ; C60.2@5853.43,4360.74 C59.2@5888.76,4360.74 ; C78.1@5871,5537.38 5872.38,5536 v1(5899,5536) ; C59.2@5889.33,4360.74 C55.2@5924.43,4360.74 ; v1(5928,5540) 5950.03,5540 5950.03,5539 5956.85,5532.19 R84.1@5956.85,5531.42 ; v1(5937,5687) 5986.63,5637.37 Y1.4@6020.12,5637.37 ; R171.2@6020.96,3798 6020.96,3808.63 6058.8,3846.47 6073.47,3846.47 v1(6075,3848) ; R172.2@6056.5,3587.96 v1(6103.99,3587.99) ; v1(6060,5287) 6069.64,5277.36 U5.6@6069.64,5221.65 ; v1(6084,3293) R173.2@6084,3326.96 ; R174.2@6091.5,3131.96 6140.38,3131.96 6143.34,3129 v1(6145.5,3129) C165.1@6145.5,3076.46 ; v1(6266,3019) R170.2@6266,3055.96 ; J9.4@6745,3229 6745,3367.46 C163.1@6731.46,3381 C164.1@6975.54,3381 ; J10.4@6960.4,3526.64 6960.4,3396.14 C164.1@6975.54,3381 ; C68.2@5117.38,4545.81 C69.2@5148.28,4545.81 ; C164.1@6975.54,3381 C164.1@6978.54,3378 6978.54,3381 C164.1@6975.54,3381
  other v1: 4411,2572.85 4472,2572.85 4520,2617.85 4453,2620.85 4492,2666.85 6080,4694 6040,4720 6080,4721
VDDA_3V3: C25.2 C30.1 C31.1 C51.2 C52.2 C54.1 L4.2 S1.1 S1.4 S2.1 S2.4 U1.P6 U1.R6 U3.4 U4.2 | length 920.9
  Top Layer w10: L4.2@4917.98,2879 v1(5061.5,2879) ; C54.1@5043.84,2751 v1(5090.84,2751) ; S2.1@5044.1,3829.93 5054.01,3839.83 v1(5054.01,3885.1) ; S2.4@5044.1,3975.59 5058.79,3960.91 5058.79,3940.32 v1(5088.01,3911.1) ; C25.2@5315.5,4071.1 5316.49,4071.1 5330.19,4057.4 5330.19,4028.81 v1(5331,4028) ; v1(5375.44,4458.76) U1.R6@5391.19,4474.51 ; v1(5375.44,4490.26) U1.P6@5391.19,4506.01 ; v1(5405,3850) 5449.79,3805.21 U4.2@5449.79,3743.6 ; U3.4@5489.6,3905.15 5489.67,3905.07 5529.93,3905.07 v1(5530,3905) ; v1(5679,3886) 5680.53,3884.47 5680.53,3882.1 5708.84,3853.79 5708.84,3841.98 S1.4@5722.9,3827.93 ; v1(5679,3916) 5679,3917.89 5708.21,3947.1 5708.21,3958.91 S1.1@5722.9,3973.6
  Bottom Layer w10: C30.1@5180,3934.5 5184.5,3939 v1(5224,3939) ; C31.1@5365,3953.5 5367.5,3951 v1(5414,3951) ; v1(5375.44,4490.26) 5376.98,4491.79 5380.31,4491.79 5407.26,4518.74 5406.23,4519.77 5406.23,4552.56 C52.2@5404.4,4554.38
  other v1: 5356,3996 5416,3997 5392,4027
pads on no net: J1. J1.4 J1.10 J1.17 J1.22 J1.32 J1.51 J1.62 J1.67 J1.78 J1.79 J1.81 J1.86 J1.91 J1.94 J1.97 J1.98 J1.99 J1.100 J2. J2.1 J2.2 J2.4 J2.9 J2.10 J2.11 J2.12 J2.15 J2.16 J2.17 J2.18 J2.19 J2.40 J2.59 J2.60 J2.61 J2.62 J2.63 J2.64 J2.65 J2.66 J2.67 J2.68 J2.69 J2.70 J2.87 J2.88 J2.91 J2.93 J2.94 J2.95 J9.6 J9.7 J9.8 J10.5 J10.6 J10.7 J10.8 J10.9 J11.6 J12. J12.7 J12.14 J12.16 J12.28 J12.30 J12.32 J12.34 J12.35 J12.36 J12.37 J12.38 J12.39 J12.40 J12.41 J12.53 J12.55 J12.57 J12.59 J12.61 J12.63 J12.64 J12.65 J12.66 J12.67 J12.68 J12.70 J12.72 J12.82 U1.H4 U1.J18 U1.J19 U1.V13 U1.W12 U3.8 U3.9 U4.1 U4.3 U4.7 U4.8 U8.V
copper on no net: | length 54.7
  Bottom Layer w10: 4093.47,5408.33 4147.67,5408.33 v1(4148,5408)

## Polygon pours and split planes (outlines as drawn)
VDD_1V2 on Signal Layer 4 "VDD_1V2_L04_P015" (solid, pour order 15): 5532.31,3243.69 5607.69,3243.69 5648.69,3284.69 5648.69,3589.96 5588.04,3649.58 5588.04,4403.86 5625.28,4441.1 5632.01,4441.1 5643.01,4452.1 5643.01,4664.1 5693.1,4664.1 5708.01,4679.01 5708.01,4747.1 5697.69,4757.42 5579.01,4757.42 5579.01,4813.1 5569.01,4823.1 5465.01,4823.1 5454.4,4812.5 5454.4,4752.5 5442.01,4740.1 5418.01,4740.1 5406.23,4728.32 5406.23,4673.37 5394.96,4662.1 5336.01,4662.1 5326.01,4652.1 5326.01,4613.1 5337.88,4601.23 5396.88,4601.23 5406.23,4591.88 5406.23,4543.72 5430.22,4519.74 5472.59,4519.74 5486.01,4506.32 5486.01,4453.1 5498.01,4441.1 5502,4437.11 5502,3274
IN_5V0 on Signal Layer 4 "IN_5V0_L04_P029" (solid, pour order 29): 7001,2965 6535,2499 5648,2499 5122,3025 5122,3210 4962,3370 4509,3370 4234,3645 4234,4686 4394,4846 4394,5431 4410,5444 4553,5587 4620,5587 4653,5554 4653,4821 4463,4631 4463,3813 4469,3813 4612,3670 4940,3670 5288,3322 5288,3172 5742,2718 6453,2718 6698,2963 6698,4019 6540,4177 6540,5535 6595,5590 6688,5590 6730,5548 6730,4541 7001,4270
VDD_3V3 on Signal Layer 4 "VDD_3V3_L04_P036" (solid, pour order 36): 6091.55,3994.98 6050.66,3954.08 6050.66,2968.34 6099,2920 6331,2920 6404,2993 6404,3951 6273,4082 6273,4273 6273,4700.5 6206,4767.5 6206,5535.43 6030.43,5711 5916,5711 5874,5669 5874,5308 5906,5276 5906,4807 6094.72,4618.28
3V3 on Signal Layer 4 "3V3_L04_P027" (solid, pour order 27): 6438,2990 6438,4002.61 6376,4064.61 6376,5384 6438,5446 6438,5497 6409,5526 6400,5526 6386,5540 6386,5576 6396,5586 6402.05,5592.05 6447.95,5592.05 6520,5520 6520,4166 6609,4077 6609,2926 6422,2739 5753,2739 5316.4,3175.6 5316.4,3338.96 5142,3513.36 4949.36,3706 4628,3706 4488,3846 4488,4614 4680,4806 4680,5686.03 4702.97,5709 4747,5709 4779,5677 4782,5672 4782,4702 4669,4589 4669,4003 4733,3939 5038,3939 5469,3508 5469,3273 5839,2903 6351,2903
3V3 on Signal Layer 4 "3V3_L04_P023" (solid, pour order 23): 3959.14,3272.79 3959.14,2482 5004.14,2482 5004.14,3182.79 4915.14,3271.79
VDDA_3V3 on Signal Layer 4 "VDDA_3V3_L04_P018" (solid, pour order 18): 5376.01,4186.01 5262,4072 5262,3976.01 5307.01,3931 5425.91,3931 5463.74,3968.84 5463.74,3976.42 5464.01,3976.69 5464.01,4493.63 5449.54,4508.1 5370.01,4508.1 5357.01,4495.1 5357.01,4441.99 5376.01,4422.99
VDD_3V3 on Signal layer 3 "VDD_3V3_L03_P026" (solid, pour order 26): 4536,2945 4536,2514 4504,2482 3976,2482 3959,2499 3959,5498.38 4062.27,5601.65 4189.27,5601.65 4221.27,5569.65 4221.27,5543.82 4185.1,5507.65 4167.27,5507.65 4118.27,5458.65 4118.27,4015.73 5066,3068 5066,2981 5049,2964 4555,2964
VDDA_3V3 on Signal layer 3 "VDDA_3V3_L03_P016" (solid, pour order 16): 5810,2937 5077,2937 5037,2897 5037,2766 5083,2720 5859,2720 5934,2720 6054,2840 6054,3746 5970,3830 5762,4038 5163.91,4038 5034.01,3908.1 5034.01,3869.99 5074,3830 5806,3830 5859,3777 5859,2986
GND on Signal Layer 5 "GND_L05_P038" (solid, pour order 38): 3955.48,6229.67 3955.48,3343.67 4945.48,3343.67 5089.48,3199.67 5089.48,2491 7281.48,2491 7281.48,6229.67
VDD_3V3 on Signal Layer 5 "VDD_3V3_L05_P024" (solid, pour order 24): 5780.7,4956 5800.64,4936.06 5800.64,4875.65 5881.42,4799 6071,4799 6129,4741 6129,4692 6063.36,4626.36 5894.48,4626.36 5841.63,4573.51 5841.63,4354.38 5801.83,4320.32 5469,4317.96 5469.93,4317.03 5425.98,4317.03 5418.12,4324.89 5210.07,4532.93 5195.09,4547.91 5195.09,4561.98 5195.09,4866.71 5195.09,4900.91 5250.18,4956
3V3 on Top Layer "3V3_L01_P011" (solid, pour order 11): 4601.5,2981.5 4601.5,2827.5 4640,2789 4861,2789 4878,2806 4878,2995 4856.5,3016.5 4636.5,3016.5
VDD_3V3 on Top Layer "VDD_3V3_L01_P043" (solid, pour order 43): 4892.46,3014 4986.51,3014 5023.51,2977 5023.51,2594 4984.51,2555 4336.34,2555 4262,2629.34 4262,2679.49 4293.51,2711 4498.51,2711 4543.51,2666 4543.51,2664 4883.98,2664 4882.96,3004.47
VDD_1V2 on Top Layer "VDD_1V2_L01_P041" (solid, pour order 41): 5152,3317 5022,3317 5002,3337 5002,3443 5024,3465 5151,3465 5173,3443 5173,3343
1V2 on Top Layer "1V2_L01_P010" (solid, pour order 10): 4989.7,3183 4896,3183 4650,3183 4621,3154 4621,3048 4636,3033 5056,3033 5147.36,3124.36 5147.36,3271.64 5127.65,3291.35 5030.35,3291.35 5011.68,3272.68 5011.68,3211.68 5011.68,3204.97
IN_5V0 on Top Layer "IN_5V0_L01_P009" (solid, pour order 9): 4029.86,2972.14 4126,2876 4348,2876 4362.5,2890.5 4362.5,2925.5 4357.5,2930.5 4186.86,2930.5 4174.86,2942.5 4174.86,2992.86 4195.5,3013.5 4315.86,3013.5 4315.86,3072.14 4298.5,3089.5 4271.5,3089.5 4252.86,3108.14 4252.86,3165.5 4272.86,3185.5 4377.86,3185.5 4377.86,3227.14 4357.5,3247.5 4191.5,3247.5 4174.86,3230.86 4075.5,3131.5 4044.5,3131.5 4029.86,3116.86
GND on Singal Layer 2 "GND_L02_P037" (solid, pour order 37): 3958,4966 5150,4966 5860.55,4966 5882.52,4944.03 5882.52,4296.52 5849,4263 5193,4263 5161,4295 5161,4966 3958,4966 3958,2487 7284,2487 7284,6224.8 3958,6224.8
GND on Singal Layer 2 "GND_L02_P044" (solid, pour order 44): 5208,4952 5836,4952 5866.48,4921.52 5866.48,4303.48 5836.65,4273.65 5208.35,4273.65 5177.68,4304.32 5177.68,4921.68
HSEC_5V0 on Bottom Layer "HSEC_5V0_L06_P031" (solid, pour order 31): 7190,5420 7149,5420 7149,5401 7189,5401 7209,5381 7209,4904 7190,4885 7149,4885 7149,4865 7189,4865 7209,4845 7209,4212 7189,4192 7149,4192 7149,4173 7188,4173 7216,4145 7216,3865 7137,3786 7137,3048 6931,2842 5742,2842 5545,3039 5377,3207 4373,3207 4037,3543 4037,4751 4055,4769 4094,4769 4094,4788 4054,4788 4037,4804 4037,5351 4053,5367 4090,5367 4090,5387 4002,5387 3971,5356 3971,2808 4000.65,2778.35 5360.65,2778.35 5640,2499 6949,2499 7282,2832 7282,5399 7261,5420

## Silkscreen, mask and mechanical layers (free items; w line width, h text height)
Top Overlay:
  circle w10: c6110,5468 r3.61
  circle w10: c7253,3772 r3.61
  circle w10: c6450,2988 r3.61
  circle w10: c4346.74,3065.87 r3.61
  circle w10: c4437,3441 r3.61
  circle w10: c5008,3805 r3.61
  circle w10: c5758,3998 r3.61
  circle w10: c5513,3807 r3.61
  circle w10: c5501,3739 r3.61
  circle w10: c5864,5360 r3.61
  circle w10: c5963,5468 r3.61
  circle w10: c6708.61,4640 r3.61
  circle w10: c6695,4084 r3.61
  circle w10: c6709,5187 r3.61
  circle w10: c4532,5144 r3.16
  circle w10: c4532,5686 r4.24
Bottom Overlay:
  circle w10: c5996,5450 r4.47
Bottom Solder:
  lines w50: 3940,2139 3940,6258 7316,6258 7316,2139 3940,2139
M1 Board Outline:
  lines w10: 3983,7294 5038.48,7294 ; 4311,2119 7336,2119 7336,7294 5906.62,7294 ; 6083.56,7317.01 6951.7,7317.01
M2 Board Dimensions:
  circle w10: c1710,3525 r521.65
  rectangle: 2460,7210 2585,7335
  rectangle: 2585,7085 2960,7210
  lines w7: 2460,7210 3460,7210 ; 2585,7085 2585,7335 ; 2710,7085 2710,7335 ; 2960,7085 2960,7335 ; 3210,7085 3210,7335 ; 2460,7085 3460,7085 3460,7335 2460,7335 2460,7085
  text "500KRW" at 1535,3495 h30
M9 Title Sheet:
  lines w10: 1005,1005 1005,12095 16495,12095 16495,1005 ; 1205,1205 1205,11895 16295,11895 16295,1205 ; 10895,1005 10995,1005 ; 10995,8975 10995,8995
M11 gerber information:
  lines w10: 1204.5,1206.67 3672.83,1206.67 ; 1204.5,1410 3674.5,1410 ; 1205,1206.67 1205,1410
  text "LAYER NAME =" at 1268,1278.34 h30

## Dimensions
3915,6288 to 7341,6288 on M2 Board Dimensions
2460,7085 to 3460,7085 on M2 Board Dimensions
3910,2490 to 3909,6282 on M2 Board Dimensions

## Text inside footprints (layer, text, board x,y; h text height)
S4: Mechanical 5 "1" at 5766.18,5340.97 h30 r90
U1: Top Overlay "RefDes" at 5442.18,4606.99 h30; Top Overlay "Designator195" at 5174.19,4971.34 h30
U8: Top Overlay "RefDes" at 4288.61,2941.25 h30